# EAGLE board QFP2DIP (EAGLE 6.3)
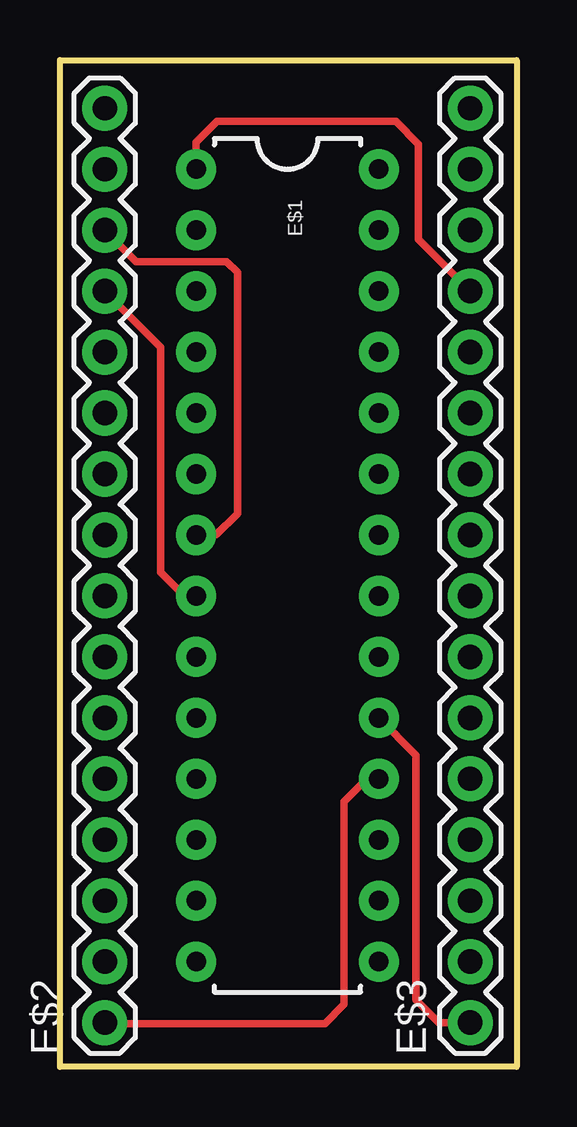
[diagram p0: board, top side]
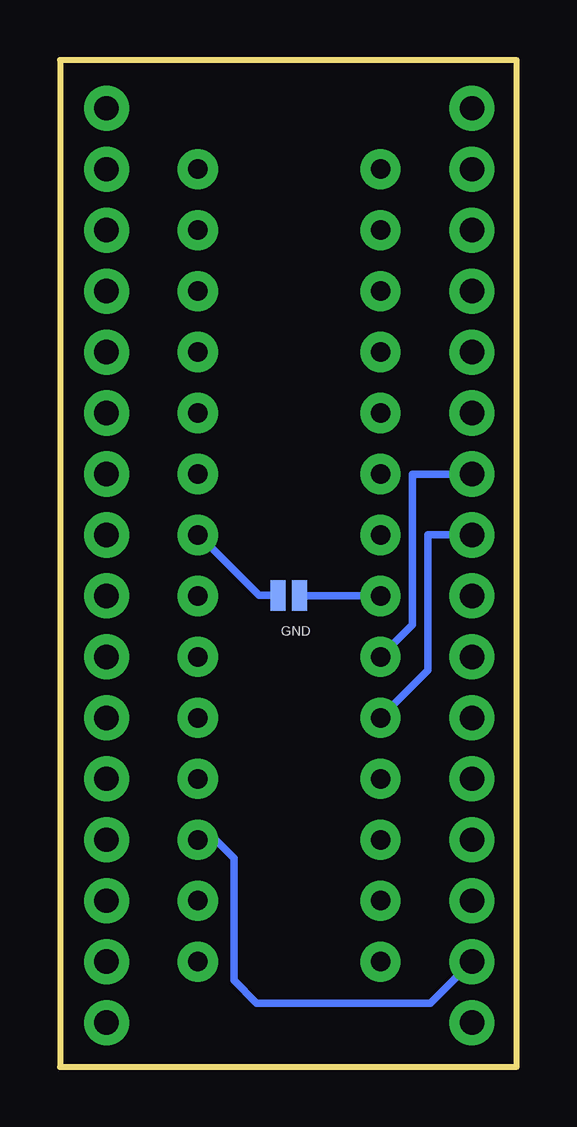
[diagram p1: board, bottom side, seen from below]

Size 19.05 x 41.95 mm. Coordinates in mm from the lower left corner, seen from the top.
Outline: 0,41.95 19.05,41.95 19.05,0 0,0 0,41.95
Copper layers (1*16): Top 0.035mm / dielectric 1.5mm / Bottom 0.035mm
Design rules "default": minimum track width 10mil, minimum drill 24mil, track to track 8mil, track to pad 8mil, pad to pad 8mil, via to via 8mil, smd to smd 8mil, copper to edge 40mil, drill to drill 8mil, minimum pad ring 10mil, minimum via ring 8mil, stop-mask expansion 4mil, vias tented up to drill 0mil, thermal gap 10mil

## Footprints (pad centres in the part's own frame; a part is rotated, then mirrored left to right if it is on the bottom)
DIL28-3-SIMON = drill 0.813 pad 1.676: 1 -16.51,-3.81; 2 -13.97,-3.81; 3 -11.43,-3.81; 4 -8.89,-3.81; 5 -6.35,-3.81; 6 -3.81,-3.81; 7 -1.27,-3.81; 8 1.27,-3.81; 9 3.81,-3.81; 10 6.35,-3.81; 11 8.89,-3.81; 12 11.43,-3.81; 13 13.97,-3.81; 14 16.51,-3.81; 15 16.51,3.81; 16 13.97,3.81; 17 11.43,3.81; 18 8.89,3.81; 19 6.35,3.81; 20 3.81,3.81; 21 1.27,3.81; 22 -1.27,3.81; 23 -3.81,3.81; 24 -6.35,3.81; 25 -8.89,3.81; 26 -11.43,3.81; 27 -13.97,3.81; 28 -16.51,3.81
1X16 = drill 1.016 pad 1.88: 1 0,0; 2 2.54,0; 3 5.08,0; 4 7.62,0; 5 10.16,0; 6 12.7,0; 7 15.24,0; 8 17.78,0; 9 20.32,0; 10 22.86,0; 11 25.4,0; 12 27.94,0; 13 30.48,0; 14 33.02,0; 15 35.56,0; 16 38.1,0
SJ_2S-NO-NS = smd 0.635 x 1.27: 1 -0.45,0; 2 0.45,0

## Placement (x,y rotation side)
E$1  [DIL28-3-SIMON]  9.49,20.89 270 top
E$2  [1X16]  1.87,1.84 90 top
E$3  [1X16]  17.11,1.84 90 top
GND  [SJ_2S-NO-NS]  9.51,19.63 180 bottom

## Library data of the parts
E$1 GND = SparkFun
E$2 E$3 = SparkFun-Connectors

## Nets
S$1: E$1.1 E$3.13
S$2: E$1.19 E$3.1
S$3: E$1.18 E$2.1
S$4: E$1.17 E$2.2
S$5: E$1.7 E$2.14
S$6: E$1.8 E$2.13 GND.1
S$7: E$1.9 E$2.10
S$8: E$1.10 E$2.9
S$9: E$1.22 GND.2

## Tracks (layer width: path | path; a pad name or v marks a point on that pad's centre or on a via)
S$1
  Top 0.305: E$3.13 14.95,34.48 14.95,38.45 14,39.4 6.55,39.4 5.68,38.53 E$1.1
S$2
  Top 0.305: E$1.19 14.85,12.99 14.85,2.8 15.81,1.84 E$3.1
S$3
  Top 0.305: E$2.1 1.91,1.8 11.05,1.8 11.85,2.6 11.85,11.05 12.8,12 E$1.18
S$4
  Bottom 0.305: E$2.2 3.6,2.65 10.85,2.65 11.8,3.6 11.8,8.7 12.56,9.46 E$1.17
S$5
  Top 0.305: E$2.14 3.18,33.55 6.95,33.55 7.4,33.1 7.4,23.05 6.51,22.16 E$1.7
S$6
  Top 0.305: E$2.13 4.2,29.99 4.2,20.6 5.18,19.62 E$1.8
  Bottom 0.305: E$1.8 GND.1
  Bottom 0.61: GND.1
S$7
  Bottom 0.305: E$2.10 4.35,24.7 4.35,18.41 E$1.9
S$8
  Bottom 0.305: E$2.9 3.7,22.16 3.7,16.52 E$1.10
S$9
  Bottom 0.305: E$1.22 13.26,22.16 10.75,19.65 9.98,19.65
  Bottom 0.61: 9.98,19.65 GND.2